# Altium PCB R100.230.010.000-00 Invertor.PcbDoc (part 2 of 2)
Units mm, origin at the board's own origin, x right, y up, seen from the top; angles counter-clockwise.
Board outline 157 x 220 mm, 2 copper layers (Top, Bottom); 111 components, 54 nets, 289 pads, 1436 vias.
Unrouted connection lines stored in the file: 3.
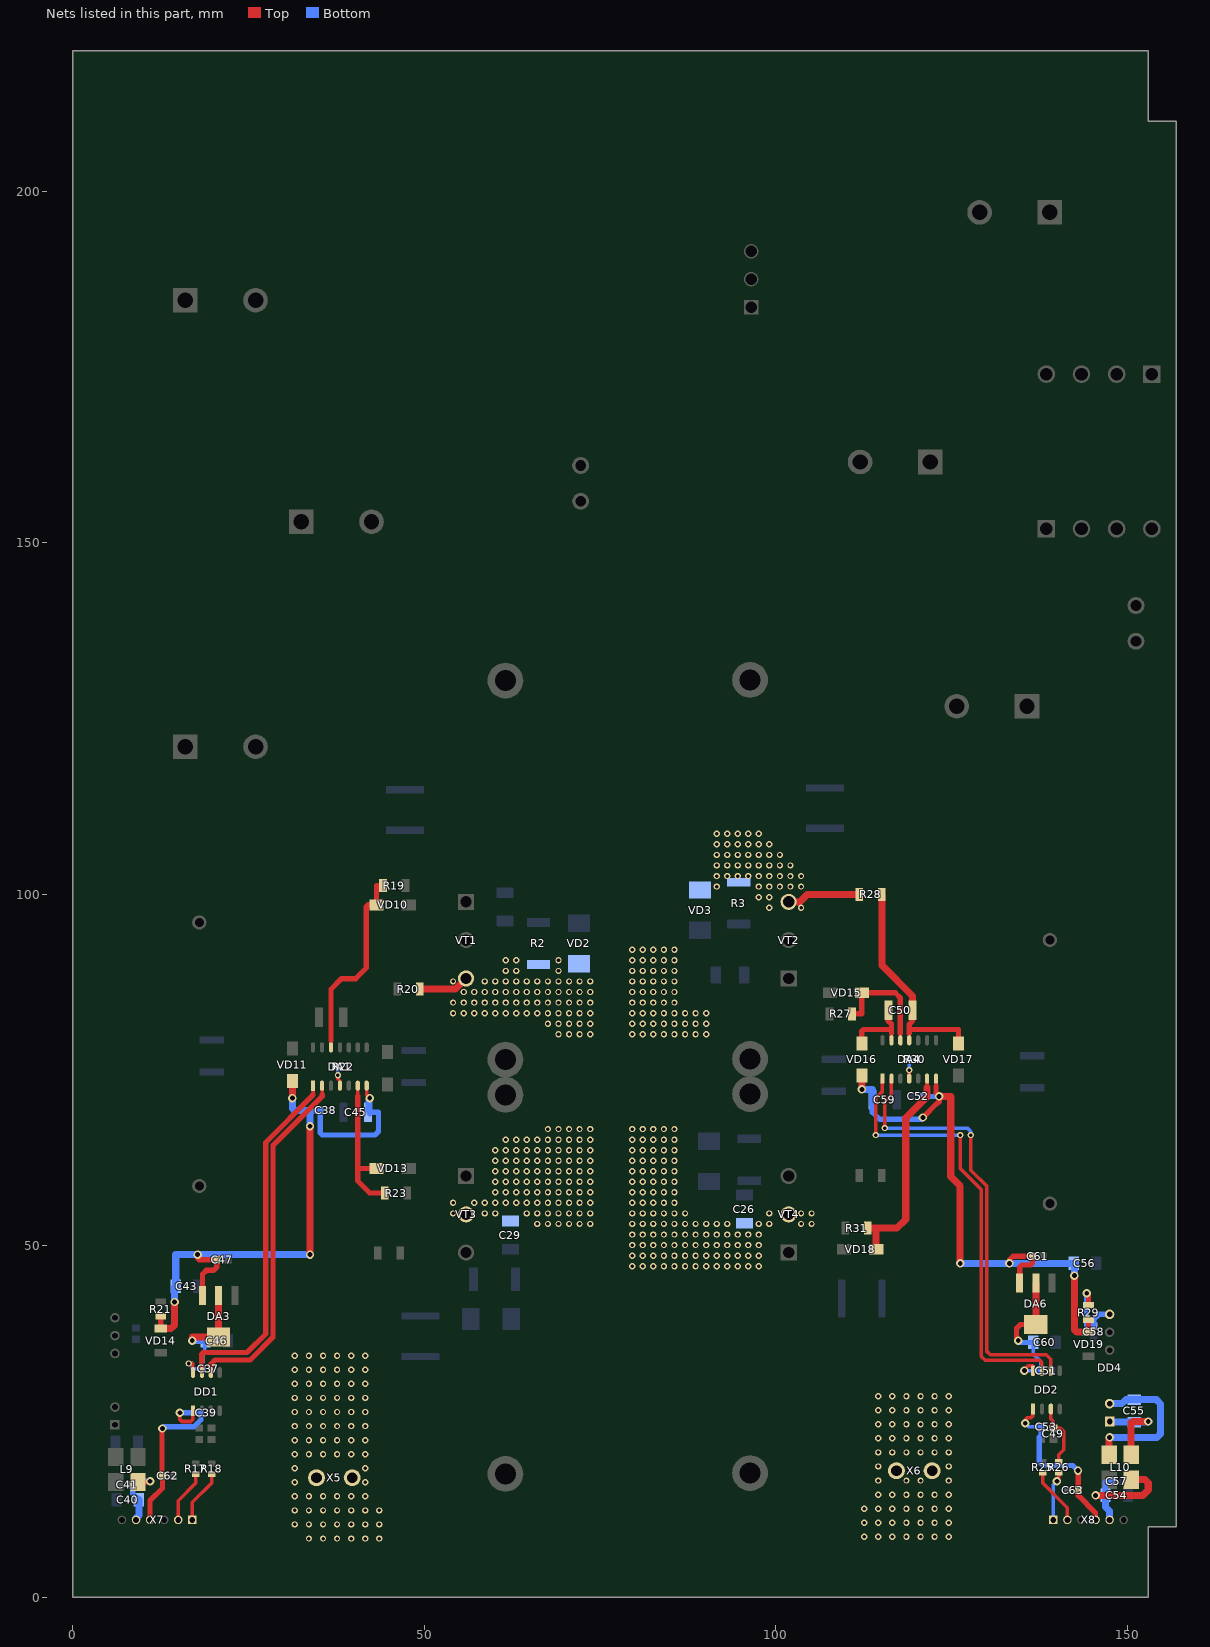
[diagram p2: the nets of this part, all layers, seen from the top]

## Via types
v1: diameter 0.9, hole 0.5, Top to Bottom, 1383 vias
v2: diameter 1.2, hole 0.7, Top to Bottom, 53 vias

## Nets (pads, with @x,y where several pads share a name; then routed paths per layer and width w, separated by ;. In a path a pad name is that pad's centre, name@x,y a point inside that pad or via, vN(x,y) a via of type N, cw(c..) or ccw(c..) an arc to the next point about the centre after c; other vN are vias at no path point) (continued)
NetC49_1: C49.1 DD2.3 R26.2 | length 9.2
  Top w0.5: DD2.3@139.135,26.775 139.135,25.365 139.504,24.996 C49.1@139.504,24.05 140.574,24.05 141,23.624 141,21 140.25,20.25 R26.2@140.25,19.275
NetC50_1: C50.1 DA4.13 VD16.2 | length 10.5
  Top w0.5: C50.1@116,83.475 C50.1@116.025,83.5 ; DA4.13@116.46,79.225 116.46,80.21
  Top w0.75: VD16.2@112.25,78.8 112.25,80.5 112.5,80.75 116.46,80.75 ; C50.1@116,83.5 116,83.475 116,82 116.46,81.54 116.46,80.75 ; 116.46,80.21 116.46,80.75
NetC50_2: C50.2 DA4.11 R28.1 VD17.2 | length 31.8
  Top w0.5: DA4.11@119,79.225 119,80.25
  Top w0.75: 119,80.25 119,80.875 ; C50.2@119.475,83.5 119.475,81.975 119,81.5 119,80.875 ; VD17.2@126,78.8 126,80.75 119.125,80.75 119,80.875
  Top w1: R28.1@115.1,100 115.1,89.9 119.475,85.525 C50.2@119.475,83.5
NetC55_1: C55.1 DD4.2 L10.3 | length 21.9
  Top w1: L10.3@147.425,20.278 147.425,22.675 v2(147.5,22.75)
  Bottom w1: v2(147.5,22.75) 154.25,22.75 154.75,23.25 154.75,27.5 154.15,28.1 C55.1@151,28.1 149.85,28.1 149.29,27.54 DD4.2@147.5,27.54
NetC55_2: C55.2 DD4.1 L10.2 | length 12.6
  Top w1: L10.2@150.575,20.278 150.575,24.825 150.75,25 v2(153,25)
  Bottom w1: DD4.1@147.5,25 147.6,24.9 C55.2@151,24.9 152.9,24.9 v2(153,25)
NetC58_2: C58.2 DD4.7 R29.1 | length 11.1
  Top w0.75: v2(144.25,43.25) 144.5,43 R29.1@144.5,41.55
  Bottom w0.75: v2(144.25,43.25) 144.2,43.2 144.2,38.55 C58.2@145.25,38.55 145.25,39.5 145.99,40.24 DD4.7@147.5,40.24
NetDA1_1: DA1.1 DD1.7 | length 51
  Top w0.5: DD1.7@18.365,31.975 18.365,32.865 ; 34.19,71.56 DA1.1@34.19,72.775
  Top w0.75: 18.365,32.865 18.365,34.615 18.55,34.8 24.8,34.8 27.45,37.45 27.45,64.7 34.19,71.44 34.19,71.56
NetDA1_2: DA1.2 DD1.6 | length 50.3
  Top w0.5: DD1.6@19.635,31.975 19.635,32.885 ; 35.475,71.5 35.5,71.525 DA1.2@35.5,72.75
  Top w0.75: 19.635,32.885 19.635,33.135 20.25,33.75 25.25,33.75 28.5,37 28.5,64.25 35.475,71.225 35.475,71.5
NetDA1_4: DA1.4 R22.2 | length 2.9
  Top w0.5: v1(37.725,74.275) 37.725,73.775 38,73.5 DA1.4@38,72.775
  Bottom w0.5: R22.2@37.725,75.5 v1(37.725,74.275) v1@37.75,74.25
NetDA1_6: DA1.6 R23.1 VD13.2 | length 20.8
  Top w0.5: 40.54,71.29 DA1.6@40.54,72.775
  Top w0.75: 40.54,71.29 40.54,61 ; VD13.2@43.2,61 40.54,61 ; R23.1@44.4,57.5 42.25,57.5 40.54,59.21 40.54,61
NetDA1_12: DA1.12 R19.1 VD10.2 | length 28.5
  Top w0.5: DA1.12@36.73,78.225 36.73,79.23
  Top w0.75: 36.73,79.23 36.75,79.25 36.75,86.5 38.25,88 40.25,88 41.75,89.5 41.75,98.25 42,98.5 VD10.2@43.2,98.5 43.2,101.25 R19.1@44.15,101.25
NetDA4_1: DA4.1 DD2.7 | length 63.3
  Top w0.5: v1(114.25,65.75) 114.25,71 115.19,71.94 DA4.1@115.19,73.775 ; v1(126.25,65.75) 126.25,61 129.25,58 129.25,34.25 129.8,33.7 137.55,33.7 137.865,33.385 DD2.7@137.865,32.225
  Bottom w0.5: v1(114.25,65.75) 114.3,65.7 126.2,65.7 v1(126.25,65.75)
NetDA4_2: DA4.2 DD2.6 | length 63.3
  Top w0.5: v1(115.5,66.75) 115.5,70.5 116.46,71.46 DA4.2@116.46,73.775 ; v1(127.75,65.75) 127.75,60.75 130.05,58.45 130.05,34.95 130.5,34.5 138.5,34.5 139.135,33.865 DD2.6@139.135,32.225
  Bottom w0.5: v1(115.5,66.75) 127.25,66.75 127.75,66.25 v1(127.75,65.75)
NetDA4_4: DA4.4 R30.2 | length 2.7
  Top w0.5: DA4.4@119,73.775 v1(119,75)
  Bottom w0.5: R30.2@118.975,76.5 119,76.475 v1(119,75)
NetDA4_6: DA4.6 R31.1 VD18.2 | length 30.2
  Top w0.5: 121.54,72.54 DA4.6@121.54,73.775
  Top w1: R31.1@113.1,52.5 114.25,52.5 ; VD18.2@114.3,49.5 114.3,52.45 114.25,52.5 ; 121.54,72.54 121.54,71.202 118.5,68.162 118.5,53.75 117.25,52.5 114.25,52.5
NetDA4_12: DA4.12 R27.1 VD15.2 | length 16.2
  Top w0.5: DA4.12@117.73,79.225 117.73,80.23
  Top w0.75: R27.1@110.85,83 112.25,83 112.25,85.95 VD15.2@112.3,86 117,86 117.73,85.27 117.73,80.23
PWM_1: R17.1 X7.2 | length 7.5
  Top w0.5: X7.2@15,11 15,13.75 17.5,16.25 R17.1@17.5,17.475
PWM_2: R25.1 X8.2 | length 8.2
  Top w0.5: R25.1@138,17.725 138,16.25 141.5,12.75 X8.2@141.5,11
SD_1: R18.1 X7.1 | length 7.6
  Top w0.5: X7.1@17,11 17,13.5 19.75,16.25 R18.1@19.75,17.475
SD_2: R26.1 X8.1 | length 7
  Top w0.5: v2(140,16.5) 140.25,16.75 R26.1@140.25,17.725
  Bottom w0.5: X8.1@139.5,11 139.5,16 v2(140,16.5)
V5_C1: C39.2 C62.1 DD1.1 X7.4 | length 28
  Top w0.5: v2(15.25,26.25) 15.25,25.25 15.5,25 16.75,25 17.095,25.345 DD1.1@17.095,26.525
  Top w0.75: X7.4@11,11 11,13.75 12.75,15.5 C62.1@12.75,17.25 ; C62.1@12.7,17.25 12.7,23.95 v2(12.75,24)
  Bottom w0.75: v2(12.75,24) 13,24.25 17.25,24.25 18.25,25.25 C39.2@18.25,26.25 ; v2(15.25,26.25) C39.2@18.2,26.25
V5_C2: C53.2 C63.1 DD2.1 X8.4 | length 24.4
  Top w0.5: v2(135.5,24.75) 135.5,25.25 135.75,25.5 136.25,25.5 136.595,25.845 DD2.1@136.595,26.775
  Top w0.75: v2(143,18) 143.05,17.95 C63.1@143.05,15.25 143.05,14.45 145.5,12 X8.4@145.5,11
  Bottom w0.5: v2(135.5,24.75) 136,24.25 C53.2@137.7,24.25
  Bottom w0.75: C53.2@137.7,24.25 137.75,24.2 137.75,23 137.5,22.75 137.5,19.25 138,18.75 142.25,18.75 v2(143,18)
V5_DR_1: C37.2 C46.2 DA3.2 DA3.4 DD1.8 | length 20.7
  Top w0.5: v1(16.5,33.25) 17,33.25 17.095,33.155 DD1.8@17.095,31.975
  Top w1: v2(17,36.5) 17,37 17.05,37.05 DA3.4@20.75,37.05 DA3.2@20.75,42.95
  Bottom w0.5: v1(16.5,33.25) 17,33.25 17,32.5 C37.2@18.45,32.5 18.5,32.5 18.5,34.75 18.75,35 C46.2@18.75,36.5
  Bottom w1: v2(17,36.5) 18.75,36.5 C46.2@18.9,36.5
V5_DR_2: C51.2 C60.2 DA6.2 DA6.4 DD2.8 | length 22
  Top w0.5: v2(135.375,32.25) 135.375,32.375 135.9,32.9 136.595,32.9 DD2.8@136.595,32.225
  Top w0.75: v2(134.5,36.5) 134.25,36.75 134.25,38.25 134.8,38.8 DA6.4@137,38.8
  Top w1: DA6.4@137,38.8 DA6.2@137,44.7
  Bottom w0.5: v2(135.375,32.25) C51.2@137.7,32.25 137.7,33.55 136.65,34.6 C60.2@136.65,36.25
  Bottom w0.75: v2(134.5,36.5) 134.75,36.25 C60.2@136.65,36.25
V12_C1: C40.2 C41.2 L9.1 X7.5 | length 9.9
  Top w0.75: L9.1@9.275,16.4 10.9,16.4 v2(11,16.5)
  Bottom w0.75: C40.2@9.4,13.878 8.55,14.728 C41.2@8.55,16 9.05,16.5 v2(11,16.5)
  Bottom w1: X7.5@9,11 9,11.25 9.4,11.65 C40.2@9.4,13.878
V12_C2: C54.2 C57.2 L10.1 X8.5 | length 19.3
  Top w1: v2(145.5,14.5) 152.25,14.5 153,15.25 153,16.25 152.528,16.722 L10.1@150.575,16.722
  Bottom w0.75: C54.2@146.9,14.5 146.9,16.4 147,16.5 C57.2@147.7,16.5
  Bottom w1: v2(145.5,14.5) C54.2@146.9,14.5 146.9,12.85 147.5,12.25 X8.5@147.5,11
V15_DR_1: C38.1 C43.2 C45.1 C47.2 DA1.7 DA3.3 R21.2 VD11.1 VD14.2 | length 93.5
  Top w0.5: DA1.7@41.81,72.775 41.81,71.44 v2(42.25,71)
  Top w0.75: VD14.2@12.5,38.225 R21.2@12.5,39.95 ; v2(17.75,48.75) 17.75,48.25 18,48 C47.2@20.45,48 ; DA3.3@18.45,42.95 18.45,45.95 19,46.5 20,46.5 20.5,47 C47.2@20.5,48
  Top w1: VD14.2@12.5,38.225 13.975,38.225 14.5,38.75 v2(14.5,42) ; v2(31.25,71) VD11.1@31.25,73.45 ; v2(33.75,48.75) v2(33.75,67)
  Bottom w0.75: C38.1@35.2,69.2 35.2,66.05 35.5,65.75 43,65.75 43.5,66.25 43.5,69 42.5,69 42.25,68.75 v2(42.25,71) 42,70.75 C45.1@42,69.225
  Bottom w1: v2(14.5,42) 14.5,44.1 C43.2@14.65,44.25 14.65,48.75 v2(17.75,48.75) v2(33.75,48.75) ; v2(31.25,71) 31.25,69.5 31.5,69.25 34,69.25 ; v2(33.75,67) 33.75,69 34,69.25 ; C38.1@35.2,69.25 34,69.25
V15_DR_2: C52.1 C56.2 C59.1 C61.2 DA4.7 DA6.3 R29.2 VD16.1 VD19.2 | length 88.1
  Top w0.5: 122.81,72.69 DA4.7@122.81,73.775
  Top w0.75: v2(120.947,68.25) 122.972,70.275 123.025,70.275 123.25,70.5 v2@123.25,71.23 ; 122.81,72.69 122.81,71.69 v2(123.25,71.25) ; v2(133.25,47.5) 133.25,48 133.75,48.5 C61.2@136.45,48.5 136.5,48.5 136.5,47.5 136.25,47.25 135,47.25 134.7,46.95 DA6.3@134.7,44.7 ; VD19.2@144.5,37.725 R29.2@144.5,39.45
  Top w1: v2(112.25,72.25) VD16.1@112.25,74.2 ; v2(123.25,71.25) 124.9,71.25 124.9,59.85 126.25,58.5 v2(126.25,47.5) ; v2(142.5,45.75) 142.5,38 142.775,37.725 VD19.2@144.5,37.725
  Bottom w0.75: C59.1@113.775,70 113.75,69.975 113.75,69 114.75,68 120.697,68 v2(120.947,68.25) ; C52.1@121.05,71.25 v2(123.25,71.25) ; 136.45,47.45 136.5,47.5
  Bottom w1: v2(112.25,72.25) 113.75,72.25 113.775,72.225 C59.1@113.775,70.75 C59.1@113.775,70 ; v2(126.25,47.5) v2(133.25,47.5) 136.5,47.5 C56.2@142.4,47.5 ; v2(142.5,45.75) 142.5,47.35 C56.2@142.65,47.5
VOUT+_4: C29.2 R2.1 R20.2 VD2.2 VT1.3 VT3.2 X5.1 X5.2 | length 7.2
  Top w1: R20.2@49.35,86.5 54.425,86.5 VT1.3@55.95,88.025
  other v1: 33.6,8.35 35.6,8.35 37.6,8.35 39.6,8.35 41.6,8.35 43.6,8.35 31.6,10.35 33.6,10.35 35.6,10.35 37.6,10.35 39.6,10.35 41.6,10.35 43.6,10.35 31.6,12.35 33.6,12.35 35.6,12.35 37.6,12.35 39.6,12.35 41.6,12.35 43.6,12.35 31.6,14.35 33.6,14.35 35.6,14.35 37.6,14.35 39.6,14.35 41.6,14.35 31.6,16.35 41.6,16.35 31.6,18.35 41.6,18.35 31.6,20.35 33.6,20.35 35.6,20.35 37.6,20.35 39.6,20.35 41.6,20.35 31.6,22.35 33.6,22.35 35.6,22.35 37.6,22.35 39.6,22.35 41.6,22.35 31.6,24.35 33.6,24.35 35.6,24.35 37.6,24.35 39.6,24.35 41.6,24.35 31.6,26.35 33.6,26.35 35.6,26.35 37.6,26.35 39.6,26.35 41.6,26.35 31.6,28.35 33.6,28.35 35.6,28.35 37.6,28.35 39.6,28.35 41.6,28.35 31.6,30.35 33.6,30.35 35.6,30.35 37.6,30.35 39.6,30.35 41.6,30.35 31.6,32.35 33.6,32.35 35.6,32.35 37.6,32.35 39.6,32.35 41.6,32.35 31.6,34.35 33.6,34.35 35.6,34.35 37.6,34.35 39.6,34.35 41.6,34.35 66.1,53.1 67.6,53.1 69.1,53.1 70.6,53.1 72.1,53.1 73.6,53.1 54.1,54.6 58.6,54.6 60.1,54.6 64.6,54.6 66.1,54.6 67.6,54.6 69.1,54.6 70.6,54.6 72.1,54.6 73.6,54.6 54.1,56.1 57.1,56.1 58.6,56.1 60.1,56.1 61.6,56.1 63.1,56.1 64.6,56.1 66.1,56.1 67.6,56.1 69.1,56.1 70.6,56.1 72.1,56.1 73.6,56.1 60.1,57.6 61.6,57.6 63.1,57.6 64.6,57.6 66.1,57.6 67.6,57.6 69.1,57.6 70.6,57.6 72.1,57.6 73.6,57.6 60.1,59.1 61.6,59.1 63.1,59.1 64.6,59.1 66.1,59.1 67.6,59.1 69.1,59.1 70.6,59.1 72.1,59.1 73.6,59.1 60.1,60.6 61.6,60.6 63.1,60.6 64.6,60.6 66.1,60.6 67.6,60.6 69.1,60.6 70.6,60.6 72.1,60.6 73.6,60.6 60.1,62.1 61.6,62.1 63.1,62.1 64.6,62.1 66.1,62.1 67.6,62.1 69.1,62.1 70.6,62.1 72.1,62.1 73.6,62.1 60.1,63.6 61.6,63.6 63.1,63.6 64.6,63.6 66.1,63.6 67.6,63.6 69.1,63.6 70.6,63.6 72.1,63.6 73.6,63.6 61.6,65.1 63.1,65.1 64.6,65.1 66.1,65.1 67.6,65.1 69.1,65.1 70.6,65.1 72.1,65.1 73.6,65.1 67.6,66.6 69.1,66.6 70.6,66.6 72.1,66.6 73.6,66.6 69.1,80.1 70.6,80.1 72.1,80.1 73.6,80.1 67.6,81.6 69.1,81.6 70.6,81.6 72.1,81.6 73.6,81.6 54.1,83.1 55.6,83.1 57.1,83.1 58.6,83.1 60.1,83.1 61.6,83.1 63.1,83.1 64.6,83.1 66.1,83.1 67.6,83.1 69.1,83.1 70.6,83.1 72.1,83.1 73.6,83.1 54.1,84.6 55.6,84.6 57.1,84.6 58.6,84.6 60.1,84.6 61.6,84.6 63.1,84.6 64.6,84.6 66.1,84.6 67.6,84.6 69.1,84.6 70.6,84.6 72.1,84.6 73.6,84.6 55.6,86.1 57.1,86.1 58.6,86.1 60.1,86.1 61.6,86.1 63.1,86.1 64.6,86.1 66.1,86.1 67.6,86.1 69.1,86.1 70.6,86.1 72.1,86.1 73.6,86.1 54.1,87.6 58.6,87.6 60.1,87.6 61.6,87.6 63.1,87.6 64.6,87.6 66.1,87.6 67.6,87.6 69.1,87.6 70.6,87.6 72.1,87.6 73.6,87.6 61.6,89.1 63.1,89.1 69.1,89.1 61.6,90.6 63.1,90.6 69.1,90.6
VOUT-_4: C26.2 R3.1 R28.2 VD3.2 VT2.3 VT4.2 X6.1 X6.2 | length 10.5
  Top w1: VT2.3@101.85,98.925 103.425,98.925 104.5,100 R28.2@111.9,100
  other v1: 112.6,8.6 114.6,8.6 116.6,8.6 118.6,8.6 120.6,8.6 122.6,8.6 124.6,8.6 112.6,10.6 114.6,10.6 116.6,10.6 118.6,10.6 120.6,10.6 122.6,10.6 124.6,10.6 112.6,12.6 114.6,12.6 116.6,12.6 118.6,12.6 120.6,12.6 122.6,12.6 124.6,12.6 114.6,14.6 116.6,14.6 118.6,14.6 120.6,14.6 122.6,14.6 124.6,14.6 114.6,16.6 118.6,16.6 120.6,16.6 124.6,16.6 114.6,18.6 124.6,18.6 114.6,20.6 116.6,20.6 118.6,20.6 120.6,20.6 122.6,20.6 124.6,20.6 114.6,22.6 116.6,22.6 118.6,22.6 120.6,22.6 122.6,22.6 124.6,22.6 114.6,24.6 116.6,24.6 118.6,24.6 120.6,24.6 122.6,24.6 124.6,24.6 114.6,26.6 116.6,26.6 118.6,26.6 120.6,26.6 122.6,26.6 124.6,26.6 114.6,28.6 116.6,28.6 118.6,28.6 120.6,28.6 122.6,28.6 124.6,28.6 79.6,47.1 81.1,47.1 82.6,47.1 84.1,47.1 85.6,47.1 87.1,47.1 88.6,47.1 90.1,47.1 91.6,47.1 93.1,47.1 94.6,47.1 96.1,47.1 97.6,47.1 79.6,48.6 81.1,48.6 82.6,48.6 84.1,48.6 85.6,48.6 87.1,48.6 88.6,48.6 90.1,48.6 91.6,48.6 93.1,48.6 94.6,48.6 96.1,48.6 97.6,48.6 79.6,50.1 81.1,50.1 82.6,50.1 84.1,50.1 85.6,50.1 87.1,50.1 88.6,50.1 90.1,50.1 91.6,50.1 93.1,50.1 94.6,50.1 96.1,50.1 97.6,50.1 79.6,51.6 81.1,51.6 82.6,51.6 84.1,51.6 85.6,51.6 87.1,51.6 88.6,51.6 90.1,51.6 91.6,51.6 93.1,51.6 94.6,51.6 96.1,51.6 97.6,51.6 79.6,53.1 81.1,53.1 82.6,53.1 84.1,53.1 85.6,53.1 87.1,53.1 88.6,53.1 90.1,53.1 91.6,53.1 93.1,53.1 97.6,53.1 99.1,53.1 103.6,53.1 105.1,53.1 79.6,54.6 81.1,54.6 82.6,54.6 84.1,54.6 85.6,54.6 87.1,54.6 99.1,54.6 103.6,54.6 105.1,54.6 79.6,56.1 81.1,56.1 82.6,56.1 84.1,56.1 85.6,56.1 79.6,57.6 81.1,57.6 82.6,57.6 84.1,57.6 85.6,57.6 79.6,59.1 81.1,59.1 82.6,59.1 84.1,59.1 85.6,59.1 79.6,60.6 81.1,60.6 82.6,60.6 84.1,60.6 85.6,60.6 79.6,62.1 81.1,62.1 82.6,62.1 84.1,62.1 85.6,62.1 79.6,63.6 81.1,63.6 82.6,63.6 84.1,63.6 85.6,63.6 79.6,65.1 81.1,65.1 82.6,65.1 84.1,65.1 85.6,65.1 79.6,66.6 81.1,66.6 82.6,66.6 84.1,66.6 85.6,66.6 79.6,80.1 81.1,80.1 82.6,80.1 84.1,80.1 85.6,80.1 87.1,80.1 88.6,80.1 90.1,80.1 79.6,81.6 81.1,81.6 82.6,81.6 84.1,81.6 85.6,81.6 87.1,81.6 88.6,81.6 90.1,81.6 79.6,83.1 81.1,83.1 82.6,83.1 84.1,83.1 85.6,83.1 87.1,83.1 88.6,83.1 90.1,83.1 79.6,84.6 81.1,84.6 82.6,84.6 84.1,84.6 85.6,84.6 79.6,86.1 81.1,86.1 82.6,86.1 84.1,86.1 85.6,86.1 79.6,87.6 81.1,87.6 82.6,87.6 84.1,87.6 85.6,87.6 79.6,89.1 81.1,89.1 82.6,89.1 84.1,89.1 85.6,89.1 79.6,90.6 81.1,90.6 82.6,90.6 84.1,90.6 85.6,90.6 79.6,92.1 81.1,92.1 82.6,92.1 84.1,92.1 85.6,92.1 99.1,98.1 103.6,98.1 97.6,99.6 99.1,99.6 91.6,101.1 97.6,101.1 99.1,101.1 100.6,101.1 102.1,101.1 103.6,101.1 91.6,102.6 93.1,102.6 94.6,102.6 96.1,102.6 97.6,102.6 99.1,102.6 100.6,102.6 102.1,102.6 103.6,102.6 91.6,104.1 93.1,104.1 94.6,104.1 96.1,104.1 97.6,104.1 99.1,104.1 100.6,104.1 102.1,104.1 91.6,105.6 93.1,105.6 94.6,105.6 96.1,105.6 97.6,105.6 99.1,105.6 100.6,105.6 91.6,107.1 93.1,107.1 94.6,107.1 96.1,107.1 97.6,107.1 99.1,107.1 91.6,108.6 93.1,108.6 94.6,108.6 96.1,108.6 97.6,108.6
pads on no net: DA1.8 DA1.9 DA1.10 DA1.14 DA4.8 DA4.9 DA4.10 DA4.14 DD3.6 DD4.6 X4.2

## Polygon pours and split planes (outlines as drawn)
+VIN_200 on Top "+VIN_200" (solid, pour order 4): 134.75,200.25 134.75,184.25 cw(c133.25,184.25) 133.25,182.75 99.75,182.75 cw(c99.75,184.25) 98.25,184.25 98.25,184.75 ccw(c97.751,184.75) 97.75,185.25 95.25,185.25 ccw(c95.249,184.751) 94.75,184.75 94.75,181.75 94.75,181.25 cw(c93,181.25) 93,179.5 21.75,179.5 cw(c21.75,181.25) 20,181.25 20,196 ccw(c18.5,196) 18.5,197.5 5,197.5 ccw(c5,196) 3.5,196 3.5,96 ccw(c9.25,96) 9.25,90.25 24,90.25 38.501,90.251 ccw(c38.501,91.75) 40,91.75 40,101.75 ccw(c38.5,101.75) 38.5,103.25 25.501,103.25 cw(c25.501,108.751) 20,108.751 20,142.5 cw(c21.5,142.5) 21.5,144 34.5,144 ccw(c34.5,145.5) 36,145.5 36,165.25 cw(c37.5,165.25) 37.5,166.75 116.25,166.75 cw(c116.25,165.25) 117.75,165.25 117.75,134.75 ccw(c119.25,134.75) 119.25,133.25 129.25,133.25 cw(c129.25,131.75) 130.75,131.75 130.75,103.75 cw(c129.25,103.75) 129.25,102.25 118.5,102.25 ccw(c118.5,101) 117.25,101 117.25,91.751 ccw(c118.483,91.751) 118.481,90.518 147.962,90.463 ccw(c147.965,91.999) 149.5,91.999 149.5,118.5 149.5,119.5 ccw(c147.001,119.501) 147,122 cw(c147,123.75) 145.25,123.75 145.25,142.75 ccw(c144,142.75) 144,144 132.5,144 cw(c132.5,145.75) 130.75,145.75 130.75,166 cw(c132.25,166) 132.25,167.5 143.75,167.5 ccw(c143.75,169) 145.25,169 145.25,180.25 145.25,180.5 cw(c146.25,180.5) 146.25,181.5 149,181.5 ccw(c149,182.75) 150.25,182.75 150.25,200.25 ccw(c148,200.25) 148,202.5 137,202.5 ccw(c137,200.25)
-VIN_200 on Top "-VIN_200_L01_P088" (solid, pour order 88): 22.5,195.25 22.5,183.25 ccw(c24,183.25) 24,181.75 35.75,181.75 ccw(c35.75,183.25) 37.25,183.25 37.25,195.25 ccw(c35.75,195.25) 35.75,196.75 24,196.75 ccw(c24,195.25)
-VIN_200 on Top "-VIN_200_L01_P084" (solid, pour order 84): 53,144.25 40,144.25 cw(c40,145.75) 38.5,145.75 38.5,162.75 cw(c40,162.75) 40,164.25 53,164.25 cw(c53,162.75) 54.5,162.75 54.5,145.75 cw(c53,145.75)
-VIN_200 on Top "-VIN_200_L01_P078" (solid, pour order 78): 36.25,112.5 24.25,112.5 cw(c24.25,114) 22.75,114 22.75,132.25 cw(c24.25,132.25) 24.25,133.75 36.25,133.75 cw(c36.25,132.25) 37.75,132.25 37.75,114 cw(c36.25,114)
VOUT+_4 on Top "VOUT+_4_L01_P040" (solid, pour order 40): 60.5,66 66,66 ccw(c66,67) 67,67 67,67.5 cw(c68,67.5) 68,68.5 74.25,68.5 cw(c74.25,67.25) 75.5,67.25 75.5,66 75.5,52.75 75.5,24.5 cw(c74,24.5) 74,23 48.25,23 ccw(c48.25,21.5) 46.75,21.5 46.75,9.25 cw(c45,9.25) 45,7.5 32.25,7.5 cw(c32.25,9.25) 30.5,9.25 30.5,23 30.5,39.25 cw(c32,39.25) 32,40.75 59.5,40.75 ccw(c59.5,42.25) 61,42.25 61,51.25 ccw(c59.5,51.25) 59.5,52.75 54.25,52.75 cw(c54.25,54.25) 52.75,54.25 52.75,56 cw(c54.25,56) 54.25,57.5 58.5,57.5 ccw(c58.5,58.5) 59.5,58.5 59.5,65 cw(c60.5,65)
-VIN_200 on Top "-VIN_200_L01_P048" (solid, pour order 48): 46.75,42.75 57.5,42.75 ccw(c57.5,44.25) 59,44.25 59,49.25 ccw(c57.5,49.25) 57.5,50.75 50.75,50.75 50.75,53 ccw(c49.25,53) 49.25,54.5 46.75,54.5 ccw(c46.75,53) 45.25,53 45.25,44.25 ccw(c46.75,44.25)
VOUT-_4 on Top "VOUT-_4_L01_P044" (solid, pour order 44): 78.75,68.25 89.25,68.25 cw(c89.25,67) 90.5,67 90.5,63 ccw(c92.25,63) 92.25,61.25 96.25,61.25 cw(c96.25,59.75) 97.75,59.75 97.75,57.75 ccw(c99.25,57.75) 99.25,56.25 104.75,56.25 cw(c104.75,55.25) 105.75,55.25 105.75,52.5 cw(c104.75,52.5) 104.75,51.5 100,51.5 ccw(c100,51) 99.5,51 99.5,43 ccw(c101.25,43) 101.25,41.25 124.5,41.25 cw(c124.5,39.5) 126.25,39.5 126.25,23 126.25,9.25 cw(c124.5,9.25) 124.5,7.5 109.5,7.5 cw(c109.5,9) 108,9 108,21.5 ccw(c106.5,21.5) 106.5,23 79.25,23 cw(c79.25,24.5) 77.75,24.5 77.75,67.25 cw(c78.75,67.25)
+VIN_200 on Top "+VIN_200_L01_P052" (solid, pour order 52): 95.25,91.5 95.25,88.75 99.75,88.75 99.75,90.75 105.5,90.75 105.5,88.75 113.25,88.75 113.25,97 107,97 107,95.25 99,95.25
-VIN_200 on Top "-VIN_200_L01_P050" (solid, pour order 50): 99.75,65.5 99.75,59.5 ccw(c101,59.5) 101,58.25 106.5,58.25 cw(c106.5,57) 107.75,57 107.75,56 ccw(c109,56) 109,54.75 111.75,54.75 ccw(c111.75,56) 113,56 113,58.25 113,63.896 ccw(c111.543,63.896) 112.573,64.927 111.177,66.323 ccw(c110.146,65.293) 110.146,66.75 101,66.75 ccw(c101,65.5)
+VIN_200 on Top "+VIN_200_L01_P046" (solid, pour order 46): 43.5,95 43.5,91.75 ccw(c45,91.75) 45,90.25 49.5,90.25 ccw(c49.5,91) 50.25,91 cw(c51,91) 51,91.75 57,91.75 ccw(c57,93.25) 58.5,93.25 58.5,95 ccw(c57,95) 57,96.5 45,96.5 ccw(c45,95)
VOUT+_4 on Top "GND_SINK" (solid, pour order 38): 52.25,83.5 ccw(c53.75,83.5) 53.75,82 65.5,82 cw(c65.5,80.75) 66.75,80.75 66.75,80.5 ccw(c68.25,80.5) 68.25,79 74,79 ccw(c74,80.5) 75.5,80.5 75.5,82 75.5,90.25 ccw(c74,90.25) 74,91.75 62,91.75 ccw(c62,90.75) 61,90.75 cw(c60,90.75) 60,89.75 53.75,89.75 ccw(c53.75,88.25) 52.25,88.25
VOUT-_4 on Top "VOUT-_4_L01_P042" (solid, pour order 42): 77.75,106.25 77.75,80.5 ccw(c79.25,80.5) 79.25,79 89.5,79 ccw(c89.5,80.5) 91,80.5 91,83.25 cw(c92,83.25) 92,84.25 ccw(c92,85.5) 93.25,85.5 93.25,99.25 95.543,99.25 cw(c95.543,95.733) 98.03,98.22 98.396,97.854 ccw(c99.854,99.311) 99.854,97.25 104.25,97.25 ccw(c104.25,98) 105,98 105,106.043 ccw(c101.483,106.043) 103.97,108.53 103.53,108.97 ccw(c101.043,106.483) 101.043,110 81.5,110 ccw(c81.5,106.25)
GND_SINK on Top "GND_SINK" (solid, pour order 36): 56.5,132.25 56.5,128.25 ccw(c59,128.25) 59,125.75 100,125.75 ccw(c100,128) 102.25,128 102.25,132.25 ccw(c99.75,132.25) 99.75,134.75 59,134.75 ccw(c59,132.25)
GND_SINK on Top "GND_SINK" (solid, pour order 32): 57.5,78 57.5,70 ccw(c60,70) 60,67.5 63.5,67.5 ccw(c63.5,70) 65.592,68.632 cw(c67.417,68.1) 67.417,70 90.75,70 cw(c90.75,68.438) 92.192,69.038 ccw(c94.5,70) 94.5,67.5 98,67.5 ccw(c98,70) 100.5,70 100.5,78 ccw(c98.25,78) 98.25,80.25 94.75,80.25 ccw(c94.75,77.5) 92.176,78.468 cw(c90.778,78.994) 90.778,77.5 67.325,77.5 cw(c67.325,79.182) 65.699,78.751 ccw(c63.25,77.5) 63.25,80.25 59.75,80.25 ccw(c59.75,78)
GND_SINK on Top "GND_SINK" (solid, pour order 30): 59.5,14.25 98,14.25 ccw(c98,16.75) 100.5,16.75 100.5,18.5 ccw(c98,18.5) 98,21 59.75,21 ccw(c59.75,18.75) 57.5,18.75 57.5,16.25 ccw(c59.5,16.25)
GND on Top "GND" (solid, pour order 0): 146.5,178.5 146.5,133.5 ccw(c148,133.5) 148,132 154.5,132 ccw(c154.5,133.5) 156,133.5 156,178.5 ccw(c154.5,178.5) 154.5,180 148,180 ccw(c148,178.5)
-VIN_200 on Top "-VIN_200_L01_P070" (solid, pour order 70): 119,204.75 119,189.25 ccw(c120.5,189.25) 120.5,187.75 130.75,187.75 ccw(c130.75,189.5) 132.5,189.5 132.5,204.75 ccw(c131,204.75) 131,206.25 120.5,206.25 ccw(c120.5,204.75)
-VIN_200 on Top "-VIN_200_L01_P072" (solid, pour order 72): 133,157.75 133,147.75 ccw(c134.5,147.75) 134.5,146.25 143.75,146.25 ccw(c143.75,147.75) 145.25,147.75 145.25,157.75 ccw(c143.75,157.75) 143.75,159.25 134.5,159.25 ccw(c134.5,157.75)
-VIN_200 on Top "-VIN_200_L01_P074" (solid, pour order 74): 115.5,162.5 115.5,152.5 cw(c114,152.5) 114,151 102.5,151 cw(c102.5,152.5) 101,152.5 101,162.5 cw(c102.5,162.5) 102.5,164 114,164 cw(c114,162.5)
-VIN_200 on Top "-VIN_200_L01_P076" (solid, pour order 76): 115.25,131 127,131 cw(c127,129.5) 128.5,129.5 128.5,119.5 cw(c127,119.5) 127,118 115.25,118 cw(c115.25,119.5) 113.75,119.5 113.75,129.5 cw(c115.25,129.5)
-VIN_200 on Bottom "-VIN_200" (solid, pour order 8): 102.499,139 112.25,139 cw(c112.25,137.501) 113.75,137.5 113.75,111.5 ccw(c120.75,111.5) 120.75,104.5 141.25,104.5 cw(c141.25,103.001) 142.75,103 142.75,65.5 cw(c141.251,65.499) 141.25,64 140.25,64 cw(c140.249,65.499) 138.75,65.5 138.75,73 ccw(c138.001,73) 138,73.75 135,73.75 ccw(c134.999,73.001) 134.25,73 134.25,65.5 cw(c132.75,65.5) 132.75,64 115,64 cw(c115,68.75) 110.25,68.75 110.25,72.5 ccw(c109.501,72.5) 109.5,73.25 107,73.25 ccw(c106.999,72.501) 106.25,72.5 106.25,68.75 cw(c104.25,68.75) 104.25,66.75 89,66.75 ccw(c89,66) 88.25,66 88.25,64 ccw(c89,64) 89,63.25 98.749,63.25 cw(c98.749,62) 100,62 100,59.75 ccw(c101.75,59.75) 101.75,58 105.081,58 cw(c105.081,55.516) 107.168,56.865 cw(c101.433,53.147) 107.675,55.932 ccw(c109.5,56.75) 109.5,54.75 116.25,54.75 cw(c116.25,53.25) 117.75,53.25 117.75,47 cw(c116.251,47) 116.25,45.5 114.75,45.5 ccw(c114.75,44.75) 114,44.75 114,40 ccw(c114.75,40) 114.75,39.25 121.5,39.25 ccw(c121.5,40.5) 122.75,40.5 122.75,50.25 cw(c124,50.25) 124,51.5 154.25,51.5 ccw(c154.25,53.25) 156,53.25 156,118.5 ccw(c154.501,118.5) 154.5,120 132,120 cw(c131.999,121.999) 130,122 130,137.5 cw(c131.5,137.5) 131.5,139 143.75,139 ccw(c143.75,140.5) 145.25,140.5 145.25,155.75 145.25,157.75 ccw(c143.751,157.75) 143.75,159.25 135.25,159.25 ccw(c135.249,158.001) 134,158 134,157 cw(c132.751,156.999) 132.75,155.75 117.5,155.75 cw(c117.499,157.249) 116,157.25 116,186.25 cw(c117.5,186.25) 117.5,187.75 131.5,187.75 ccw(c131.5,189.25) 133,189.25 133,204.75 ccw(c131.501,204.75) 131.5,206.25 102.5,206.25 ccw(c102.499,204.751) 101,204.75 101,194.75 cw(c99.501,194.749) 99.5,193.25 95.25,193.25 ccw(c95.248,192.752) 94.75,192.75 94.75,190.25 ccw(c95.249,190.249) 95.25,189.75 99.5,189.75 cw(c99.5,188.251) 101,188.25 101,181.75 cw(c99.501,181.749) 99.5,180.25 55.5,180.25 cw(c55.5,181.75) 54,181.75 54,196.5 ccw(c52.5,196.5) 52.5,198 23.5,198 ccw(c23.5,196.5) 22,196.5 22,169 ccw(c23.5,169) 23.5,167.5 36,167.5 cw(c36,165.75) 37.75,165.75 37.75,147.75 cw(c36.25,147.75) 36.25,146.25 24,146.25 ccw(c24,144.75) 22.5,144.75 22.5,117 cw(c21,117) 21,115.5 3.5,115.5 ccw(c3.5,114) 2,114 2,53 ccw(c3.5,53) 3.5,51.5 13.75,51.5 38.25,51.5 cw(c38.25,50) 39.75,50 39.75,45.5 39.75,39 ccw(c41.25,39) 41.25,37.5 57.5,37.5 ccw(c57.5,38.75) 58.75,38.75 58.75,49.25 ccw(c57.25,49.25) 57.25,50.75 52.25,50.75 cw(c52.25,52.5) 50.5,52.5 50.5,73.25 ccw(c49.5,73.25) 49.5,74.25 47.501,74.25 ccw(c47.5,73.25) 46.5,73.249 46.5,65.5 cw(c45,65.5) 45,64 23.5,64 cw(c23.5,65.5) 22,65.5 22,75 ccw(c21,75) 21,76 18.5,76 ccw(c18.5,75) 17.5,75 17.5,65.5 cw(c16,65.5) 16,64 15.25,64 cw(c15.25,65.5) 13.75,65.5 13.75,103 cw(c15.25,103) 15.25,104.5 38.25,104.5 ccw(c38.25,106) 39.75,106 39.75,128 cw(c41.25,128) 41.25,129.5 52.5,129.5 ccw(c52.5,131) 54,131 54,164.25 cw(c55.5,164.25) 55.5,165.75 99.5,165.75 cw(c99.501,164.251) 101,164.25 101,140.5 ccw(c102.499,140.499)
+VIN_200 on Bottom "+VIN_200_L02_P082" (solid, pour order 82): 18.5,162.5 18.5,150 ccw(c20,150) 20,148.5 33.75,148.5 ccw(c33.75,150.25) 35.5,150.25 35.5,162.5 ccw(c34,162.5) 34,164 20,164 ccw(c20,162.5)
+VIN_200 on Bottom "+VIN_200_L02_P086" (solid, pour order 86): 4,194.25 4,180 ccw(c5.5,180) 5.5,178.5 18.25,178.5 ccw(c18.25,180) 19.75,180 19.75,194.25 ccw(c18.25,194.25) 18.25,195.75 5.5,195.75 ccw(c5.5,194.25)
+VIN_200 on Bottom "+VIN_200" (solid, pour order 10): 16,90.75 16,100.5 cw(c17.5,100.5) 17.5,102 41.75,102 ccw(c41.75,103.75) 43.5,103.75 43.5,104.75 43.5,109.25 cw(c44.5,109.25) 44.5,110.25 51,110.25 cw(c51,109.25) 52,109.25 52,103.25 52,98 ccw(c53.5,98) 53.5,96.5 58.25,96.5 ccw(c58.25,96.75) 58.5,96.75 cw(c59,96.75) 59,97.25 62.5,97.25 cw(c62.5,96.75) 63,96.75 63,94.5 cw(c62.5,94.5) 62.5,94 60.5,94 59.75,94 ccw(c59.749,93.001) 58.75,93 cw(c57.5,93) 57.5,91.75 51.5,91.75 ccw(c51.5,90.75) 50.5,90.75 50.5,77.75 cw(c49.5,77.75) 49.5,76.75 47.5,76.75 cw(c47.5,77.75) 46.5,77.75 46.5,90.25 23.5,90.25 ccw(c23.5,88.75) 22,88.75 22,79.25 cw(c21,79.25) 21,78.25 18.5,78.25 cw(c18.5,79.25) 17.5,79.25 17.5,89.25 ccw(c16.5,89.25) 16.5,90.25 cw(c16.5,90.75)
+VIN_200 on Bottom "+VIN_200_L02_P080" (solid, pour order 80): 5,134.5 18.5,134.5 cw(c18.5,133) 20,133 20,119.25 cw(c18.5,119.25) 18.5,117.75 5,117.75 cw(c5,119.25) 3.5,119.25 3.5,133 cw(c5,133)
VOUT+_4 on Bottom "VOUT+_4" (solid, pour order 14): 52.75,54.25 52.75,56 cw(c54.25,56) 54.25,57.5 57.75,57.5 ccw(c57.75,59) 59.25,59 59.25,64.5 cw(c60.75,64.5) 60.75,66 64.25,66 ccw(c64.25,67.5) 65.75,67.5 65.75,80.5 ccw(c64.251,80.501) 64.25,82 53.75,82 cw(c53.75,83.25) 52.5,83.25 52.5,88.25 cw(c53.75,88.25) 53.75,89.5 59.75,89.5 ccw(c59.75,90.75) 61,90.75 cw(c62,90.75) 62,91.75 74,91.75 cw(c74.001,90.251) 75.5,90.25 75.5,52.75 75.5,9 cw(c74.001,8.999) 74,7.5 65.75,7.5 32,7.5 cw(c32,9) 30.5,9 30.5,34 cw(c32,34) 32,35.5 41.75,35.5 cw(c41.75,34) 43.25,34 43.25,15 ccw(c44.75,15) 44.75,13.5 64.25,13.5 ccw(c64.25,15) 65.75,15 65.75,51.25 ccw(c64.251,51.251) 64.25,52.75 54.25,52.75 cw(c54.25,54.25)
+VIN_200 on Bottom "+VIN_200" (solid, pour order 12): 94.25,91 94.25,86.75 ccw(c95.25,86.75) 95.25,85.75 97.75,85.75 98.5,85.75 ccw(c98.5,86.75) 99.5,86.75 99.5,89.75 cw(c100.25,89.75) 100.25,90.5 104.75,90.5 cw(c104.75,89.75) 105.5,89.75 105.5,89.234 ccw(c106.576,89.234) 105.954,88.355 cw(c105.5,87.715) 106.285,87.715 106.285,76.215 ccw(c107,76.215) 107,75.5 109.5,75.5 ccw(c109.5,76.25) 110.25,76.25 110.25,87.25 cw(c111.5,87.25) 111.5,88.5 112.5,88.5 ccw(c112.5,89.5) 113.5,89.5 cw(c114.5,89.5) 114.5,90.5 133,90.5 cw(c133,89.25) 134.25,89.25 134.25,76.75 ccw(c135,76.75) 135,76 138,76 ccw(c138,76.75) 138.75,76.75 138.75,89.5 cw(c139.75,89.5) 139.75,90.5 ccw(c139.75,91.25) 140.5,91.25 140.5,100.75 ccw(c139,100.75) 139,102.25 118.707,102.25 cw(c118.707,107.578) 114.939,103.811 111.841,106.909 cw(c114.475,109.543) 110.75,109.543 110.75,110 ccw(c110,110) 110,110.75 104,110.75 ccw(c104,110) 103.25,110 103.25,108.854 ccw(c105.311,108.854) 103.854,107.396 104.75,106.5 105.543,105.707 cw(c102.026,102.19) 107,102.189 107,97 cw(c105.5,97) 105.5,95.5 100.285,95.5 ccw(c100.285,93) 98.518,94.768 98.104,94.354 cw(c96.043,96.414) 96.043,93.5 95.25,93.5 ccw(c95.25,92.5) 94.25,92.5
GND_SINK on Bottom "GND_SINK" (solid, pour order 34): 56.5,132.5 56.5,122.75 cw(c55,122.75) 55,121.25 44.75,121.25 ccw(c44.75,120) 43.5,120 43.5,115 ccw(c44.75,115) 44.75,113.75 56.5,113.75 61.75,113.75 ccw(c61.75,115.25) 63.25,115.25 63.25,124.75 cw(c64.25,124.75) 64.25,125.75 92.25,125.75 cw(c92.25,124.5) 93.5,124.5 93.5,115.25 ccw(c95,115.25) 95,113.75 102.25,113.75 109.5,113.75 ccw(c109.5,115) 110.75,115 110.75,119.5 ccw(c109,119.5) 109,121.25 103.75,121.25 cw(c103.75,122.75) 102.25,122.75 102.25,132.25 ccw(c99.75,132.25) 99.75,134.75 77.5,134.75 77.5,161.75 ccw(c76,161.75) 76,163.25 68.5,163.25 ccw(c68.5,161.75) 67,161.75 67,134.75 58.75,134.75 ccw(c58.75,132.5)
GND_SINK on Bottom "GND_SINK" (solid, pour order 28): 46,34.25 46,16.25 ccw(c47.5,16.25) 47.5,14.75 63.25,14.75 ccw(c63.25,16) 64.5,16 64.5,19.5 ccw(c63,19.5) 63,21 54.75,21 cw(c54.75,22.5) 53.25,22.5 53.25,34.25 ccw(c51.75,34.25) 51.75,35.75 47.5,35.75 ccw(c47.5,34.25)
GND_SINK on Bottom "GND_SINK" (solid, pour order 26): 93.5,16 93.5,19.75 cw(c94.5,19.75) 94.5,20.75 103.75,20.75 ccw(c103.75,22.5) 105.5,22.5 105.5,44.75 cw(c106.75,44.75) 106.75,46 110.25,46 cw(c110.25,44.75) 111.5,44.75 111.5,16.75 cw(c109.75,16.75) 109.75,15 94.5,15 cw(c94.5,16)
N4 on Bottom "N2" (solid, pour order 24): 88.5,59.25 88.5,58 ccw(c90.5,58) 90.5,56 96.25,56 ccw(c96.25,58) 98.25,58 98.25,59.25 ccw(c96.25,59.25) 96.25,61.25 90.5,61.25 ccw(c90.5,59.25)
N2 on Bottom "N2" (solid, pour order 22): 60.5,37.25 60.5,49.75 cw(c61.5,49.75) 61.5,50.75 63,50.75 cw(c63,49.5) 64.25,49.5 64.25,37.25 cw(c62.75,37.25) 62.75,35.75 62,35.75 cw(c62,37.25)
N3 on Bottom "N3" (solid, pour order 20): 88.75,86.25 91.25,86.25 ccw(c91.25,87.5) 92.5,87.5 92.5,93.75 cw(c93.5,93.75) 93.5,94.75 96,94.75 ccw(c96,95.5) 96.75,95.5 96.75,96.25 ccw(c96,96.25) 96,97 88.75,97 ccw(c88.75,95.75) 87.5,95.75 87.5,87.5 ccw(c88.75,87.5)
N1 on Bottom "N1" (solid, pour order 18): 64.5,95.25 64.5,99.25 60.75,99.25 cw(c60.75,100.25) 59.75,100.25 59.75,101.5 cw(c60.75,101.5) 60.75,102.5 64.5,102.5 74,102.5 cw(c74,101) 75.5,101 75.5,95.25 cw(c74.5,95.25) 74.5,94.25 65.5,94.25 cw(c65.5,95.25)
GND on Bottom "GND" (solid, pour order 2): 146.5,178.5 146.5,133.5 ccw(c148,133.5) 148,132 154.5,132 ccw(c154.5,133.5) 156,133.5 156,178.5 ccw(c154.5,178.5) 154.5,180 148,180 ccw(c148,178.5)
+VIN_200 on Bottom "+VIN_200_L02_P060" (solid, pour order 60): 135.25,201 135.25,189.75 ccw(c136.75,189.75) 136.75,188.25 148.75,188.25 ccw(c148.75,189.75) 150.25,189.75 150.25,201 ccw(c148.75,201) 148.75,202.5 136.75,202.5 ccw(c136.75,201)
+VIN_200 on Bottom "+VIN_200_L02_P064" (solid, pour order 64): 143.75,167.5 134,167.5 cw(c134,169) 132.5,169 132.5,181.25 cw(c134,181.25) 134,182.75 143.75,182.75 cw(c143.75,181.25) 145.25,181.25 145.25,169 cw(c143.75,169)
+VIN_200 on Bottom "+VIN_200_L02_P066" (solid, pour order 66): 118.5,169.25 118.5,159.75 ccw(c120,159.75) 120,158.25 129.25,158.25 ccw(c129.25,159.75) 130.75,159.75 130.75,169.25 ccw(c129.25,169.25) 129.25,170.75 120,170.75 ccw(c120,169.25)
+VIN_200 on Bottom "+VIN_200_L02_P068" (solid, pour order 68): 132.25,133.25 132.25,124 ccw(c133.75,124) 133.75,122.5 143.75,122.5 ccw(c143.75,124) 145.25,124 145.25,133.75 ccw(c143.75,133.75) 143.75,135.25 133.75,135.25 ccw(c133.75,133.75) 132.25,133.75
VOUT-_4 on Bottom "VOUT+_4" (solid, pour order 16): 77.75,49 77.75,108 cw(c79.75,108) 79.75,110 96.293,110 cw(c96.293,106.483) 98.78,108.97 103.116,104.634 cw(c99.173,100.69) 104.75,100.689 104.75,98.5 cw(c103.75,98.5) 103.75,97.5 99.604,97.5 cw(c99.603,99.56) 98.146,98.104 97.604,98.646 ccw(c96.147,97.191) 96.146,99.25 87.5,99.25 ccw(c87.5,98) 86.25,98 86.25,85.75 ccw(c88.25,85.75) 88.25,83.75 90.5,83.75 cw(c90.5,82.25) 92,82.25 92,70.5 cw(c90.5,70.5) 90.5,69 87.25,69 ccw(c87.25,68) 86.25,68 86.25,58.286 ccw(c89.788,58.286) 87.179,55.896 87.877,55.134 ccw(c89.318,56.454) 89.318,54.5 96.232,54.5 ccw(c96.232,56.957) 97.97,55.22 cw(c99.853,53.336) 99.854,56 104.5,56 cw(c104.5,54.75) 105.75,54.75 105.75,52.75 cw(c104.5,52.75) 104.5,51.5 100,51.5 ccw(c100,50.5) 99,50.5 99,43.5 cw(c97.25,43.5) 97.25,41.75 92.75,41.75 ccw(c92.75,40) 91,40 91,15.5 ccw(c92.75,15.5) 92.75,13.75 113.25,13.75 113.25,28 cw(c115,28) 115,29.75 124.5,29.75 cw(c124.5,28) 126.25,27.999 126.25,13.75 126.25,9.25 cw(c124.5,9.25) 124.5,7.5 79.5,7.5 cw(c79.5,9.25) 77.75,9.25

## Silkscreen, mask and mechanical layers (free items; w line width, h text height)
Top Overlay:
  rectangle: 66.75,187.75 83.25,196.2
  rectangle: 59,134 99,149
  text "OLTEST 11.04.2019" at 63,204.25 h1.5
  text "Invertor_v1" at 65,201 h1.5
  text "R100.230.010.000" at 63.25,197.75 h1.5
Bottom Overlay:
  text "Invertor_v1" at 83.75,193.25 h1.5
  text "R100.230.010.001" at 85.25,189.75 h1.5
Board:
  lines w0.254: -131,-88.5 -131,291.5 ; 0,-160 153,-160 ; 0,0 0,220 153,220 153,210 157,210 157,10 153,10 153,0 0,0

## Text inside footprints (layer, text, board x,y; h text height)
VD2: Bottom Overlay "+" at 72.256,98.069 h1 r90
VD3: Bottom Overlay "+" at 88.994,92.681 h1 r270
VD5: Bottom Overlay "+" at 90.244,56.931 h1 r270
VD6: Bottom Overlay "+" at 64.569,39.34 h1
VD10: Top Overlay "+" at 49.55,98.875 h1 r180
VD11: Top Overlay "+" at 31.625,71.7 h1 r90
VD12: Top Overlay "+" at 45.125,71.2 h1 r90
VD13: Top Overlay "+" at 49.55,61.375 h1 r180
VD14: Top Overlay "+" at 12.825,33.175 h1 r90
VD15: Top Overlay "+" at 105.95,85.625 h1
VD16: Top Overlay "+" at 112.625,72.45 h1 r90
VD17: Top Overlay "+" at 126.375,72.45 h1 r90
VD18: Top Overlay "+" at 107.95,49.125 h1
VD19: Top Overlay "+" at 144.825,32.675 h1 r90
VT1: Top Overlay "E" at 51.375,88.533 h1 r270; Top Overlay "C" at 51.375,93.983 h1 r270; Top Overlay "G" at 51.375,98.925 h1 r270
VT2: Top Overlay "E" at 106.425,98.417 h1 r90; Top Overlay "C" at 106.425,92.967 h1 r90; Top Overlay "G" at 106.425,88.025 h1 r90
VT3: Top Overlay "E" at 51.375,49.533 h1 r270; Top Overlay "C" at 51.375,54.983 h1 r270; Top Overlay "G" at 51.375,59.925 h1 r270
VT4: Top Overlay "E" at 106.425,59.417 h1 r90; Top Overlay "C" at 106.425,53.967 h1 r90; Top Overlay "G" at 106.425,49.025 h1 r90